# Altium PCB ALio Basic.PcbDoc (part 2 of 2)
Units mm, origin at the board's own origin, x right, y up, seen from the top; angles counter-clockwise.
Board outline 88.22 x 65.32 mm, 2 copper layers (Top Layer, Bottom Layer); 640 components, 0 nets, 4036 pads, 0 vias.
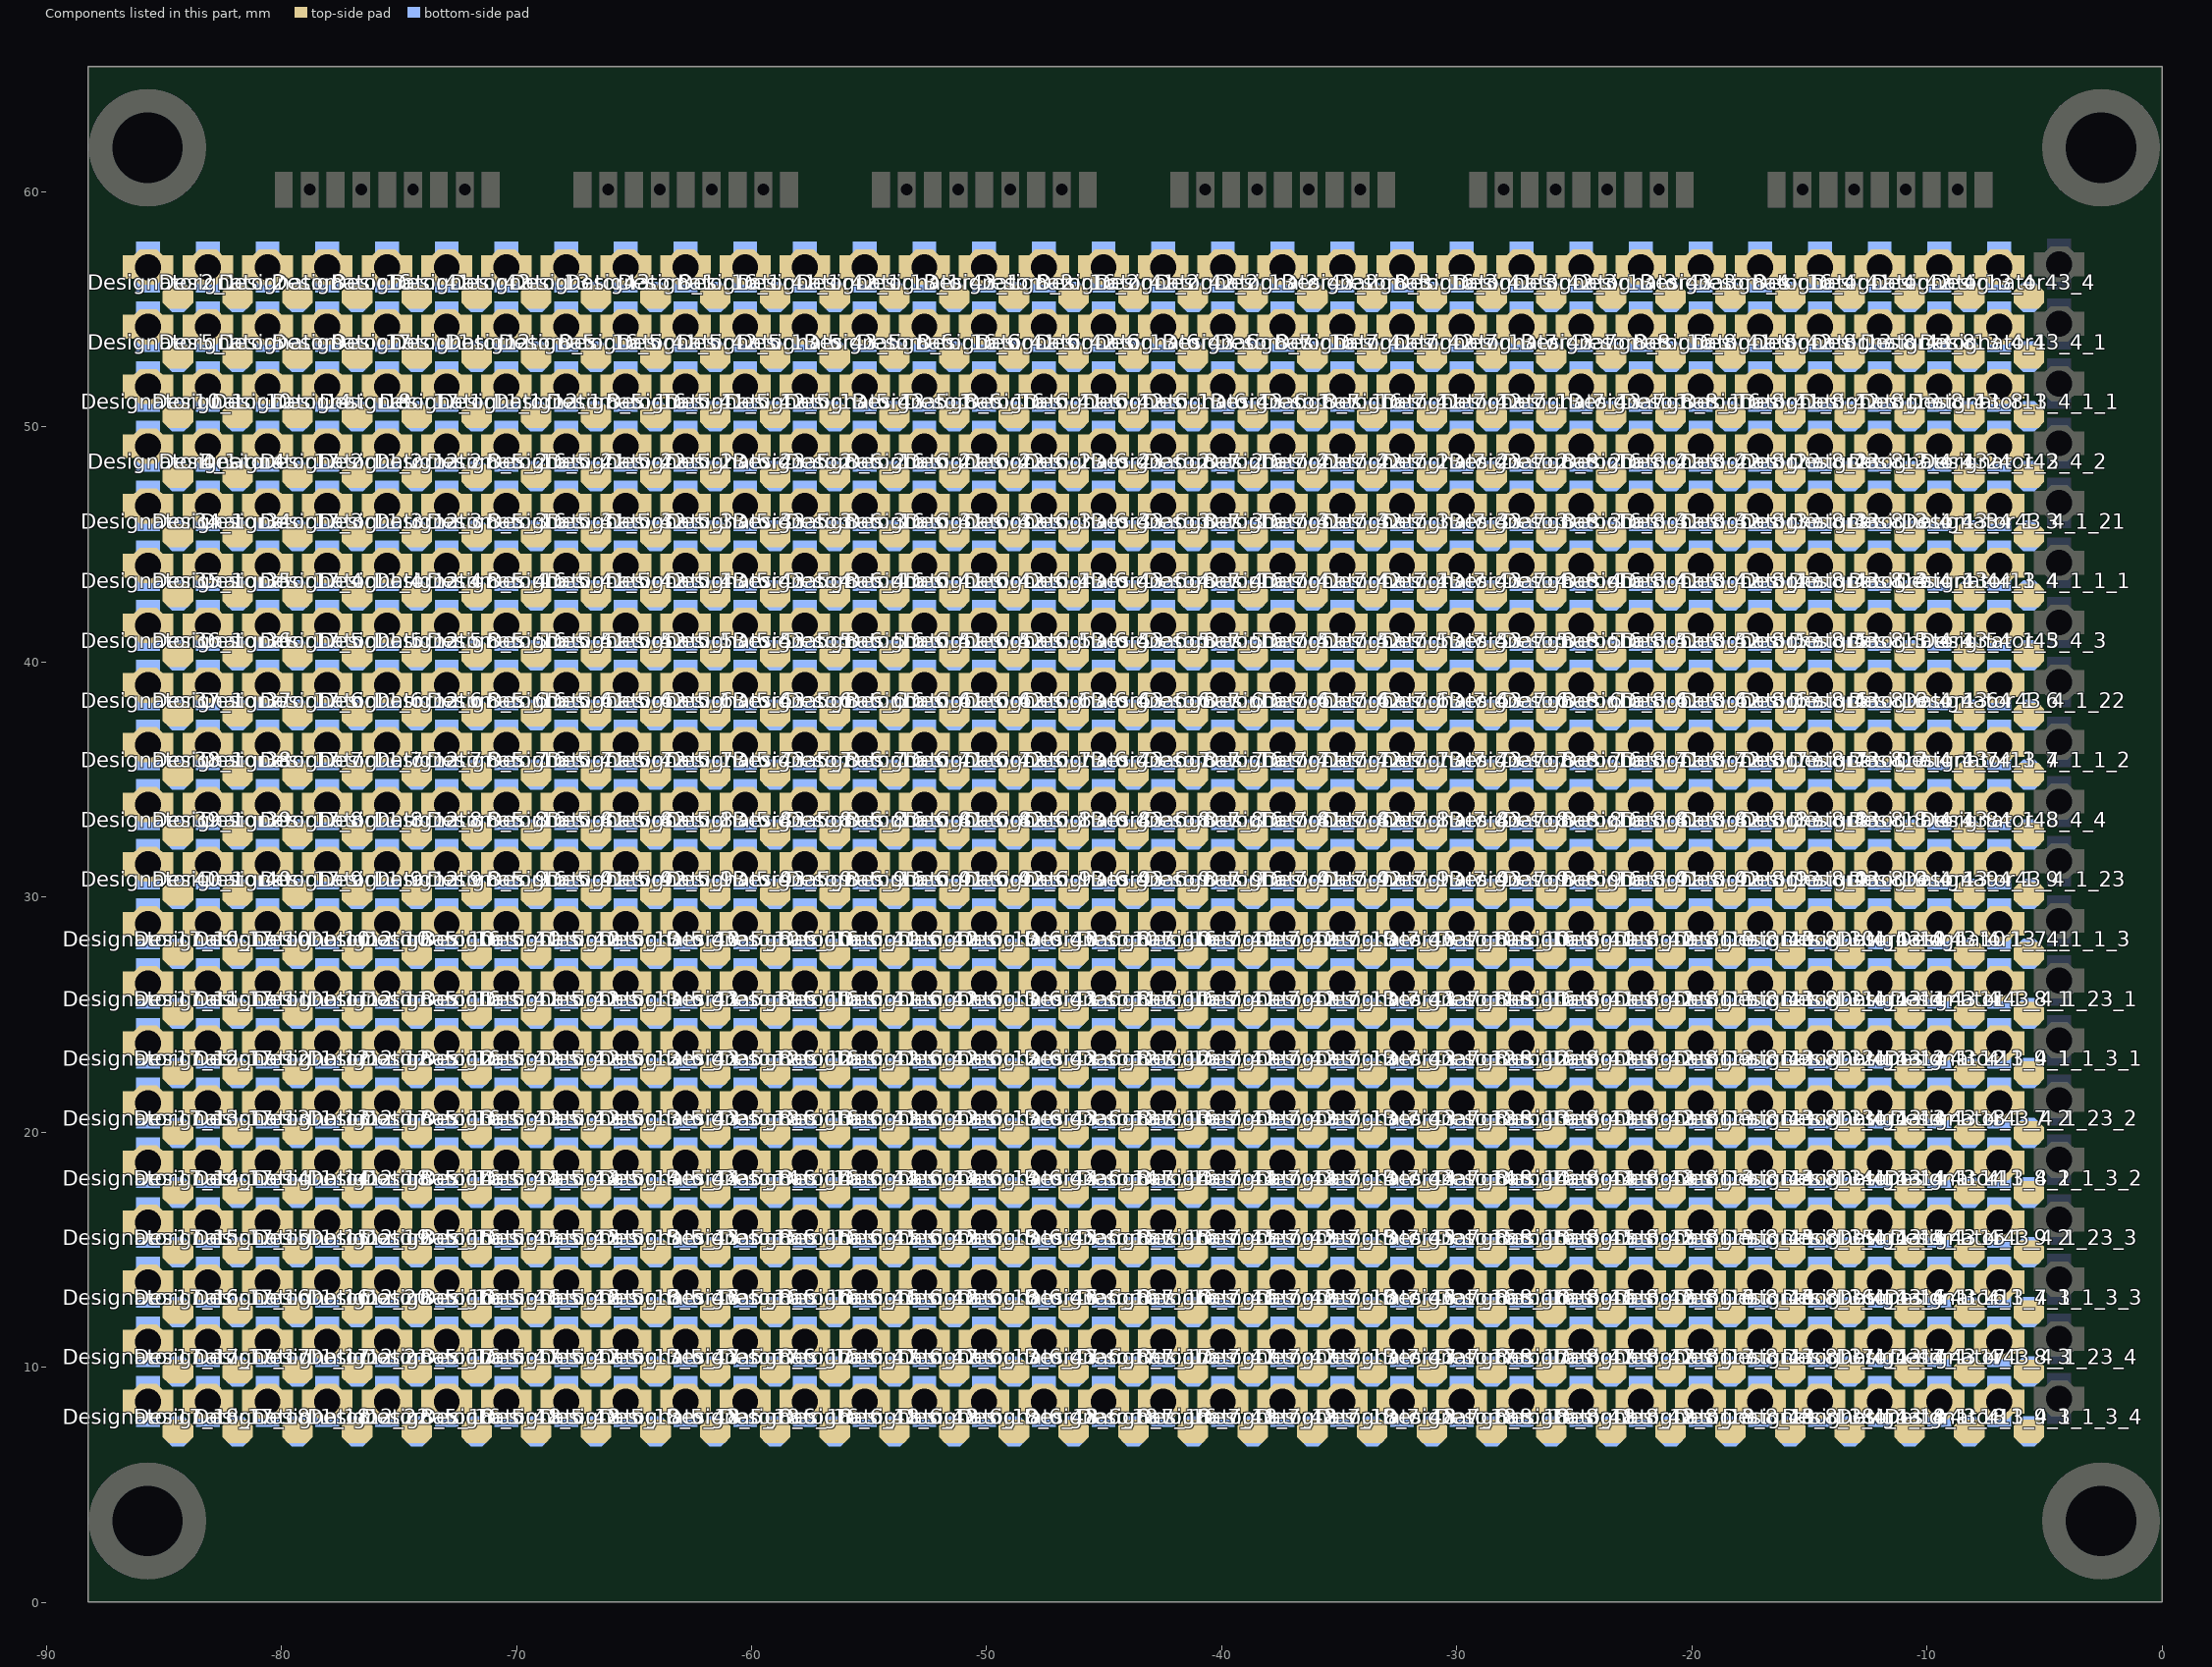
[diagram p2: the components of this part, seen from the top]

## Nets (pads, with @x,y where several pads share a name; then routed paths per layer and width w, separated by ;. In a path a pad name is that pad's centre, name@x,y a point inside that pad or via, vN(x,y) a via of type N, cw(c..) or ccw(c..) an arc to the next point about the centre after c; other vN are vias at no path point)
pads on no net: Designator2.1 Designator2.2 Designator2_1.1 Designator2_1.2 Designator4.1 Designator4.2 Designator4_1.1 Designator4_1.2 Designator5.1 Designator5.2 Designator5_1.1 Designator5_1.2 Designator8.1 Designator8.2 Designator8_1.1 Designator8_1.2 Designator8_2.1 Designator8_2.2 Designator8_3.1 Designator8_3.2 Designator8_4.1 Designator8_4.2 Designator8_5.1 Designator8_5.2 Designator8_5_1.1 Designator8_5_1.2 Designator8_5_2.1 Designator8_5_2.2 Designator8_5_3.1 Designator8_5_3.2 Designator8_5_4.1 Designator8_5_4.2 Designator8_5_5.1 Designator8_5_5.2 Designator8_5_6.1 Designator8_5_6.2 Designator8_5_7.1 Designator8_5_7.2 Designator8_5_8.1 Designator8_5_8.2 Designator8_5_9.1 Designator8_5_9.2 Designator8_5_10.1 Designator8_5_10.2 Designator8_5_11.1 Designator8_5_11.2 Designator8_5_12.1 Designator8_5_12.2 Designator8_5_13.1 Designator8_5_13.2 Designator8_5_14.1 Designator8_5_14.2 Designator8_5_15.1 Designator8_5_15.2 Designator8_5_16.1 Designator8_5_16.2 Designator8_5_17.1 Designator8_5_17.2 Designator8_5_18.1 Designator8_5_18.2 Designator8_6.1 Designator8_6.2 Designator8_6_1.1 Designator8_6_1.2 Designator8_6_2.1 Designator8_6_2.2 Designator8_6_3.1 Designator8_6_3.2 Designator8_6_4.1 Designator8_6_4.2 Designator8_6_5.1 Designator8_6_5.2 Designator8_6_6.1 Designator8_6_6.2 Designator8_6_7.1 Designator8_6_7.2 Designator8_6_8.1 Designator8_6_8.2 Designator8_6_9.1 Designator8_6_9.2 Designator8_6_10.1 Designator8_6_10.2 Designator8_6_11.1 Designator8_6_11.2 Designator8_6_12.1 Designator8_6_12.2 Designator8_6_13.1 Designator8_6_13.2 Designator8_6_14.1 Designator8_6_14.2 Designator8_6_15.1 Designator8_6_15.2 Designator8_6_16.1 Designator8_6_16.2 Designator8_6_17.1 Designator8_6_17.2 Designator8_6_18.1 Designator8_6_18.2 Designator8_7.1 Designator8_7.2 Designator8_7_1.1 Designator8_7_1.2 Designator8_7_2.1 Designator8_7_2.2 Designator8_7_3.1 Designator8_7_3.2 Designator8_7_4.1 Designator8_7_4.2 Designator8_7_5.1 Designator8_7_5.2 Designator8_7_6.1 Designator8_7_6.2 Designator8_7_7.1 Designator8_7_7.2 Designator8_7_8.1 Designator8_7_8.2 Designator8_7_9.1 Designator8_7_9.2 Designator8_7_10.1 Designator8_7_10.2 Designator8_7_11.1 Designator8_7_11.2 Designator8_7_12.1 Designator8_7_12.2 Designator8_7_13.1 Designator8_7_13.2 Designator8_7_14.1 Designator8_7_14.2 Designator8_7_15.1 Designator8_7_15.2 Designator8_7_16.1 Designator8_7_16.2 Designator8_7_17.1 Designator8_7_17.2 Designator8_7_18.1 Designator8_7_18.2 Designator8_8.1 Designator8_8.2 Designator8_8_1.1 Designator8_8_1.2 Designator8_8_2.1 Designator8_8_2.2 Designator8_8_3.1 Designator8_8_3.2 Designator8_8_4.1 Designator8_8_4.2 Designator8_8_5.1 Designator8_8_5.2 Designator8_8_6.1 Designator8_8_6.2 Designator8_8_7.1 Designator8_8_7.2 Designator8_8_8.1 Designator8_8_8.2 Designator8_8_9.1 Designator8_8_9.2 Designator8_8_10.1 Designator8_8_10.2 Designator8_8_11.1 Designator8_8_11.2 Designator8_8_12.1 Designator8_8_12.2 Designator8_8_13.1 Designator8_8_13.2 Designator8_8_14.1 Designator8_8_14.2 Designator8_8_15.1 Designator8_8_15.2 Designator8_8_16.1 Designator8_8_16.2 Designator8_8_17.1 Designator8_8_17.2 Designator8_8_18.1 Designator8_8_18.2 Designator9.1 Designator9.2 Designator10.1 Designator10.2 Designator10_1.1 Designator10_1.2 Designator11.1 Designator11.2 Designator11_1.1 Designator11_1.2 Designator11_2.1 Designator11_2.2 Designator11_3.1 Designator11_3.2 Designator11_4.1 Designator11_4.2 Designator11_5.1 Designator11_5.2 Designator11_6.1 Designator11_6.2 Designator11_7.1 Designator11_7.2 Designator11_8.1 Designator11_8.2 Designator11_9.1 Designator11_9.2 Designator11_10.1 Designator11_10.2 Designator11_11.1 Designator11_11.2 Designator11_12.1 Designator11_12.2 Designator11_13.1 Designator11_13.2 Designator11_14.1 Designator11_14.2 Designator11_15.1 Designator11_15.2 Designator11_16.1 Designator11_16.2 Designator11_17.1 Designator11_17.2 Designator11_18.1 Designator11_18.2 Designator12.1 Designator12.2 Designator12_1.1 Designator12_1.2 Designator12_2.1 Designator12_2.2 Designator12_3.1 Designator12_3.2 Designator12_4.1 Designator12_4.2 Designator12_5.1 Designator12_5.2 Designator12_6.1 Designator12_6.2 Designator12_7.1 Designator12_7.2 Designator12_8.1 Designator12_8.2 Designator12_9.1 Designator12_9.2 Designator12_10.1 Designator12_10.2 Designator12_11.1 Designator12_11.2 Designator12_12.1 Designator12_12.2 Designator12_17.1 Designator12_17.2 Designator12_18.1 Designator12_18.2 Designator12_19.1 Designator12_19.2 Designator12_20.1 Designator12_20.2 Designator12_21.1 Designator12_21.2 Designator12_22.1 Designator12_22.2 Designator13.1 Designator13.2 Designator13_1.1 Designator13_1.2 Designator13_2.1 Designator13_2.2 Designator13_3.1 Designator13_3.2 Designator13_4.1 Designator13_4.2 Designator13_4_1.1 Designator13_4_1.2 Designator13_4_1_1.1 Designator13_4_1_1.2 Designator13_4_1_1_1.1 Designator13_4_1_1_1.2 Designator13_4_1_1_2.1 Designator13_4_1_1_2.2 Designator13_4_1_1_3.1 Designator13_4_1_1_3.2 Designator13_4_1_1_3_1.1 Designator13_4_1_1_3_1.2 Designator13_4_1_1_3_2.1 Designator13_4_1_1_3_2.2 Designator13_4_1_1_3_3.1 Designator13_4_1_1_3_3.2 Designator13_4_1_1_3_4.1 Designator13_4_1_1_3_4.2 Designator13_4_1_2.1 Designator13_4_1_2.2 Designator13_4_1_3.1 Designator13_4_1_3.2 Designator13_4_1_4.1 Designator13_4_1_4.2 Designator13_4_1_5.1 Designator13_4_1_5.2 Designator13_4_1_6.1 Designator13_4_1_6.2 Designator13_4_1_7.1 Designator13_4_1_7.2 Designator13_4_1_8.1 Designator13_4_1_8.2 Designator13_4_1_9.1 Designator13_4_1_9.2 Designator13_4_1_10.1 Designator13_4_1_10.2 Designator13_4_1_11.1 Designator13_4_1_11.2 Designator13_4_1_12.1 Designator13_4_1_12.2 Designator13_4_1_13.1 Designator13_4_1_13.2 Designator13_4_1_14.1 Designator13_4_1_14.2 Designator13_4_1_15.1 Designator13_4_1_15.2 Designator13_4_1_16.1 Designator13_4_1_16.2 Designator13_4_1_17.1 Designator13_4_1_17.2 Designator13_4_1_18.1 Designator13_4_1_18.2 Designator13_5.1 Designator13_5.2 Designator13_5_1.1 Designator13_5_1.2 Designator13_5_2.1 Designator13_5_2.2 Designator13_5_3.1 Designator13_5_3.2 Designator13_5_4.1 Designator13_5_4.2 Designator13_5_5.1 Designator13_5_5.2 Designator13_5_6.1 Designator13_5_6.2 Designator13_5_7.1 Designator13_5_7.2 Designator13_5_8.1 Designator13_5_8.2 Designator13_5_9.1 Designator13_5_9.2 Designator13_5_10.1 Designator13_5_10.2 Designator13_5_11.1 Designator13_5_11.2 Designator13_5_12.1 Designator13_5_12.2 Designator13_5_13.1 Designator13_5_13.2 Designator13_5_14.1 Designator13_5_14.2 Designator13_5_15.1 Designator13_5_15.2 Designator13_5_16.1 Designator13_5_16.2 Designator13_5_17.1 Designator13_5_17.2 Designator13_5_18.1 Designator13_5_18.2 Designator13_6.1 Designator13_6.2 Designator13_6_1.1 Designator13_6_1.2 Designator13_6_2.1 Designator13_6_2.2 Designator13_6_3.1 Designator13_6_3.2 Designator13_6_4.1 Designator13_6_4.2 Designator13_6_5.1 Designator13_6_5.2 Designator13_6_6.1 Designator13_6_6.2 Designator13_6_7.1 Designator13_6_7.2 Designator13_6_8.1 Designator13_6_8.2 Designator13_6_9.1 Designator13_6_9.2 Designator13_6_10.1 Designator13_6_10.2 Designator13_6_11.1 Designator13_6_11.2 Designator13_6_12.1 Designator13_6_12.2 Designator13_6_13.1 Designator13_6_13.2 Designator13_6_14.1 Designator13_6_14.2 Designator13_6_15.1 Designator13_6_15.2 Designator13_6_16.1 Designator13_6_16.2 Designator13_6_17.1 Designator13_6_17.2 Designator13_6_18.1 Designator13_6_18.2 Designator13_7.1 Designator13_7.2 Designator13_7_1.1 Designator13_7_1.2 Designator13_7_2.1 Designator13_7_2.2 Designator13_7_3.1 Designator13_7_3.2 Designator13_7_4.1 Designator13_7_4.2 Designator13_7_5.1 Designator13_7_5.2 Designator13_7_6.1 Designator13_7_6.2 Designator13_7_7.1 Designator13_7_7.2 Designator13_7_8.1 Designator13_7_8.2 Designator13_7_9.1 Designator13_7_9.2 Designator13_7_10.1 Designator13_7_10.2 Designator13_7_11.1 Designator13_7_11.2 Designator13_7_12.1 Designator13_7_12.2 Designator13_7_13.1 Designator13_7_13.2 Designator13_7_14.1 Designator13_7_14.2 Designator13_7_15.1 Designator13_7_15.2 Designator13_7_16.1 Designator13_7_16.2 Designator13_7_17.1 Designator13_7_17.2 Designator13_7_18.1 Designator13_7_18.2 Designator13_8.1 Designator13_8.2 Designator13_8_1.1 Designator13_8_1.2 Designator13_8_2.1 Designator13_8_2.2 Designator13_8_3.1 Designator13_8_3.2 Designator13_8_4.1 Designator13_8_4.2 Designator13_8_5.1 Designator13_8_5.2 Designator13_8_6.1 Designator13_8_6.2 Designator13_8_7.1 Designator13_8_7.2 Designator13_8_8.1 Designator13_8_8.2 Designator13_8_9.1 Designator13_8_9.2 Designator13_8_10.1 Designator13_8_10.2 Designator13_8_11.1 Designator13_8_11.2 Designator13_8_12.1 Designator13_8_12.2 Designator13_8_13.1 Designator13_8_13.2 Designator13_8_14.1 Designator13_8_14.2 Designator13_8_15.1 Designator13_8_15.2 Designator13_8_16.1 Designator13_8_16.2 Designator13_8_17.1 Designator13_8_17.2 Designator13_8_18.1 Designator13_8_18.2 Designator14.1 Designator14.2 Designator16.1 Designator16.2 Designator16_1.1 Designator16_1.2 Designator16_2.1 Designator16_2.2 Designator16_3.1 Designator16_3.2 Designator16_4.1 Designator16_4.2 Designator16_5.1 Designator16_5.2 Designator16_5_1.1 Designator16_5_1.2 Designator16_5_2.1 Designator16_5_2.2 Designator16_5_3.1 Designator16_5_3.2 Designator16_5_4.1 Designator16_5_4.2 Designator16_5_5.1 Designator16_5_5.2 Designator16_5_6.1 Designator16_5_6.2 Designator16_5_7.1 Designator16_5_7.2 Designator16_5_8.1 Designator16_5_8.2 Designator16_5_9.1 Designator16_5_9.2 Designator16_5_10.1 Designator16_5_10.2 Designator16_5_11.1 Designator16_5_11.2 Designator16_5_12.1 Designator16_5_12.2 Designator16_5_13.1 Designator16_5_13.2 Designator16_5_14.1 Designator16_5_14.2 Designator16_5_15.1 Designator16_5_15.2 Designator16_5_16.1 Designator16_5_16.2 Designator16_5_17.1 Designator16_5_17.2 Designator16_5_18.1 Designator16_5_18.2 Designator16_6.1 Designator16_6.2 Designator16_6_1.1 Designator16_6_1.2 Designator16_6_2.1 Designator16_6_2.2 Designator16_6_3.1 Designator16_6_3.2 Designator16_6_4.1 Designator16_6_4.2 Designator16_6_5.1 Designator16_6_5.2 Designator16_6_6.1 Designator16_6_6.2 Designator16_6_7.1 Designator16_6_7.2 Designator16_6_8.1 Designator16_6_8.2 Designator16_6_9.1 Designator16_6_9.2 Designator16_6_10.1 Designator16_6_10.2 Designator16_6_11.1 Designator16_6_11.2 Designator16_6_12.1 Designator16_6_12.2 Designator16_6_13.1 Designator16_6_13.2 Designator16_6_14.1 Designator16_6_14.2 Designator16_6_15.1 Designator16_6_15.2 Designator16_6_16.1 Designator16_6_16.2 Designator16_6_17.1 Designator16_6_17.2 Designator16_6_18.1 Designator16_6_18.2 Designator16_7.1 Designator16_7.2 Designator16_7_1.1 Designator16_7_1.2 Designator16_7_2.1 Designator16_7_2.2 Designator16_7_3.1 Designator16_7_3.2 Designator16_7_4.1 Designator16_7_4.2 Designator16_7_5.1 Designator16_7_5.2 Designator16_7_6.1 Designator16_7_6.2 Designator16_7_7.1 Designator16_7_7.2 Designator16_7_8.1 Designator16_7_8.2 Designator16_7_9.1 Designator16_7_9.2 Designator16_7_10.1 Designator16_7_10.2 Designator16_7_11.1 Designator16_7_11.2 Designator16_7_12.1 Designator16_7_12.2 Designator16_7_13.1 Designator16_7_13.2 Designator16_7_14.1 Designator16_7_14.2 Designator16_7_15.1 Designator16_7_15.2 Designator16_7_16.1 Designator16_7_16.2 Designator16_7_17.1 Designator16_7_17.2 Designator16_7_18.1 Designator16_7_18.2 Designator16_8.1 Designator16_8.2 Designator16_8_1.1 Designator16_8_1.2 Designator16_8_2.1 Designator16_8_2.2 Designator16_8_3.1 Designator16_8_3.2 Designator16_8_4.1 Designator16_8_4.2 Designator16_8_5.1 Designator16_8_5.2 Designator16_8_6.1 Designator16_8_6.2 Designator16_8_7.1 Designator16_8_7.2 Designator16_8_8.1 Designator16_8_8.2 Designator16_8_9.1 Designator16_8_9.2 Designator16_8_10.1 Designator16_8_10.2 Designator16_8_11.1 Designator16_8_11.2 Designator16_8_12.1 Designator16_8_12.2 Designator16_8_13.1 Designator16_8_13.2 Designator16_8_14.1 Designator16_8_14.2 Designator16_8_15.1 Designator16_8_15.2 Designator16_8_16.1 Designator16_8_16.2 Designator16_8_17.1 Designator16_8_17.2 Designator16_8_18.1 Designator16_8_18.2 Designator17.1 Designator17.2 Designator17_1.1 Designator17_1.2 Designator17_2.1 Designator17_2.2 Designator17_3.1 Designator17_3.2 Designator17_4.1 Designator17_4.2 Designator17_5.1 Designator17_5.2 Designator17_6.1 Designator17_6.2 Designator17_7.1 Designator17_7.2 Designator17_8.1 Designator17_8.2 Designator17_9.1 Designator17_9.2 Designator17_10.1 Designator17_10.2 Designator17_10_1.1 Designator17_10_1.2 Designator17_11.1 Designator17_11.2 Designator17_11_1.1 Designator17_11_1.2 Designator17_12.1 Designator17_12.2 Designator17_12_1.1 Designator17_12_1.2 Designator17_13.1 Designator17_13.2 Designator17_13_1.1 Designator17_13_1.2 Designator17_14.1 Designator17_14.2 Designator17_14_1.1 Designator17_14_1.2 Designator17_15.1 Designator17_15.2 Designator17_15_1.1 Designator17_15_1.2 Designator17_16.1 Designator17_16.2 Designator17_16_1.1 Designator17_16_1.2 Designator17_17.1 Designator17_17.2 Designator17_17_1.1 Designator17_17_1.2 Designator17_18.1 Designator17_18.2 Designator17_18_1.1 Designator17_18_1.2 Designator18.1 Designator18.2 Designator34.1 Designator34.2 Designator34_1.1 Designator34_1.2 Designator35.1 Designator35.2 Designator35_1.1 Designator35_1.2 Designator36.1 Designator36.2 Designator36_1.1 Designator36_1.2 Designator37.1 Designator37.2 Designator37_1.1 Designator37_1.2 Designator38.1 Designator38.2 Designator38_1.1 Designator38_1.2 Designator39.1 Designator39.2 Designator39_1.1 Designator39_1.2 Designator40.1 Designator40.2 Designator40_1.1 Designator40_1.2 Designator41.1 Designator41.2 Designator41_1.1 Designator41_1.2 Designator41_2.1 Designator41_2.2 Designator41_3.1 Designator41_3.2 Designator41_4.1 Designator41_4.2 Designator41_5.1 Designator41_5.2 Designator41_5_1.1 Designator41_5_1.2 Designator41_5_2.1 Designator41_5_2.2 Designator41_5_3.1 Designator41_5_3.2 Designator41_5_4.1 Designator41_5_4.2 Designator41_5_5.1 Designator41_5_5.2 Designator41_5_6.1 Designator41_5_6.2 Designator41_5_7.1 Designator41_5_7.2 Designator41_5_8.1 Designator41_5_8.2 Designator41_5_9.1 Designator41_5_9.2 Designator41_5_10.1 Designator41_5_10.2 Designator41_5_11.1 Designator41_5_11.2 Designator41_5_12.1 Designator41_5_12.2 Designator41_5_13.1 Designator41_5_13.2 Designator41_5_14.1 Designator41_5_14.2 Designator41_5_15.1 Designator41_5_15.2 Designator41_5_16.1 Designator41_5_16.2 Designator41_5_17.1 Designator41_5_17.2 Designator41_5_18.1 Designator41_5_18.2 Designator41_6.1 Designator41_6.2 Designator41_6_1.1 Designator41_6_1.2 Designator41_6_2.1 Designator41_6_2.2 Designator41_6_3.1 Designator41_6_3.2 Designator41_6_4.1 Designator41_6_4.2 Designator41_6_5.1 Designator41_6_5.2 Designator41_6_6.1 Designator41_6_6.2 Designator41_6_7.1 Designator41_6_7.2 Designator41_6_8.1 Designator41_6_8.2 Designator41_6_9.1 Designator41_6_9.2 Designator41_6_10.1 Designator41_6_10.2 Designator41_6_11.1 Designator41_6_11.2 Designator41_6_12.1 Designator41_6_12.2 Designator41_6_13.1 Designator41_6_13.2 Designator41_6_14.1 Designator41_6_14.2 Designator41_6_15.1 Designator41_6_15.2 Designator41_6_16.1 Designator41_6_16.2 Designator41_6_17.1 Designator41_6_17.2 Designator41_6_18.1 Designator41_6_18.2 Designator41_7.1 Designator41_7.2 Designator41_7_1.1 Designator41_7_1.2 Designator41_7_2.1 Designator41_7_2.2 Designator41_7_3.1 Designator41_7_3.2 Designator41_7_4.1 Designator41_7_4.2 Designator41_7_5.1 Designator41_7_5.2 Designator41_7_6.1 Designator41_7_6.2 Designator41_7_7.1 Designator41_7_7.2 Designator41_7_8.1 Designator41_7_8.2 Designator41_7_9.1 Designator41_7_9.2 Designator41_7_10.1 Designator41_7_10.2 Designator41_7_11.1 Designator41_7_11.2 Designator41_7_12.1 Designator41_7_12.2 Designator41_7_13.1 Designator41_7_13.2 Designator41_7_14.1 Designator41_7_14.2 Designator41_7_15.1 Designator41_7_15.2 Designator41_7_16.1 Designator41_7_16.2 Designator41_7_17.1 Designator41_7_17.2 Designator41_7_18.1 Designator41_7_18.2 Designator41_8.1 Designator41_8.2 Designator41_8_1.1 Designator41_8_1.2 Designator41_8_2.1 Designator41_8_2.2 Designator41_8_3.1 Designator41_8_3.2 Designator41_8_4.1 Designator41_8_4.2 Designator41_8_5.1 Designator41_8_5.2 Designator41_8_6.1 Designator41_8_6.2 Designator41_8_7.1 Designator41_8_7.2 Designator41_8_8.1 Designator41_8_8.2 Designator41_8_9.1 Designator41_8_9.2 Designator41_8_10.1 Designator41_8_10.2 Designator41_8_11.1 Designator41_8_11.2 Designator41_8_12.1 Designator41_8_12.2 Designator41_8_13.1 Designator41_8_13.2 Designator41_8_14.1 Designator41_8_14.2 Designator41_8_15.1 Designator41_8_15.2 Designator41_8_16.1 Designator41_8_16.2 Designator41_8_17.1 Designator41_8_17.2 Designator41_8_18.1 Designator41_8_18.2 Designator42.1 Designator42.2 Designator42_1.1 Designator42_1.2 Designator42_2.1 Designator42_2.2 Designator42_3.1 Designator42_3.2 Designator42_4.1 Designator42_4.2 Designator42_5.1 Designator42_5.2 Designator42_5_1.1 Designator42_5_1.2 Designator42_5_2.1 Designator42_5_2.2 Designator42_5_3.1 Designator42_5_3.2 Designator42_5_4.1 Designator42_5_4.2 Designator42_5_5.1 Designator42_5_5.2 Designator42_5_6.1 Designator42_5_6.2 Designator42_5_7.1 Designator42_5_7.2 Designator42_5_8.1 Designator42_5_8.2 Designator42_5_9.1 Designator42_5_9.2 Designator42_5_10.1 Designator42_5_10.2 Designator42_5_11.1 Designator42_5_11.2 Designator42_5_12.1 Designator42_5_12.2 Designator42_5_13.1 Designator42_5_13.2 Designator42_5_14.1 Designator42_5_14.2 Designator42_5_15.1 Designator42_5_15.2 Designator42_5_16.1 Designator42_5_16.2 Designator42_5_17.1 Designator42_5_17.2 Designator42_5_18.1 Designator42_5_18.2 Designator42_6.1 Designator42_6.2 Designator42_6_1.1 Designator42_6_1.2 Designator42_6_2.1 Designator42_6_2.2 Designator42_6_3.1 Designator42_6_3.2 Designator42_6_4.1 Designator42_6_4.2 Designator42_6_5.1 Designator42_6_5.2 Designator42_6_6.1 Designator42_6_6.2 Designator42_6_7.1 Designator42_6_7.2 Designator42_6_8.1 Designator42_6_8.2 Designator42_6_9.1 Designator42_6_9.2 Designator42_6_10.1 Designator42_6_10.2 Designator42_6_11.1 Designator42_6_11.2 Designator42_6_12.1 Designator42_6_12.2 Designator42_6_13.1 Designator42_6_13.2 Designator42_6_14.1 Designator42_6_14.2 Designator42_6_15.1 Designator42_6_15.2 Designator42_6_16.1 Designator42_6_16.2 Designator42_6_17.1 Designator42_6_17.2 Designator42_6_18.1 Designator42_6_18.2 Designator42_7.1 Designator42_7.2 Designator42_7_1.1 Designator42_7_1.2 Designator42_7_2.1 Designator42_7_2.2 Designator42_7_3.1 Designator42_7_3.2 Designator42_7_4.1 Designator42_7_4.2 Designator42_7_5.1 Designator42_7_5.2 Designator42_7_6.1 Designator42_7_6.2 Designator42_7_7.1 Designator42_7_7.2 Designator42_7_8.1 Designator42_7_8.2 Designator42_7_9.1 Designator42_7_9.2 Designator42_7_10.1 Designator42_7_10.2 Designator42_7_11.1 Designator42_7_11.2 Designator42_7_12.1 Designator42_7_12.2 Designator42_7_13.1 Designator42_7_13.2 Designator42_7_14.1 Designator42_7_14.2 Designator42_7_15.1 Designator42_7_15.2 Designator42_7_16.1 Designator42_7_16.2 Designator42_7_17.1 Designator42_7_17.2 Designator42_7_18.1 Designator42_7_18.2 Designator42_8.1 Designator42_8.2 Designator42_8_1.1 Designator42_8_1.2 Designator42_8_2.1 Designator42_8_2.2 Designator42_8_3.1 Designator42_8_3.2 Designator42_8_4.1 Designator42_8_4.2 Designator42_8_5.1 Designator42_8_5.2 Designator42_8_6.1 Designator42_8_6.2 Designator42_8_7.1 Designator42_8_7.2 Designator42_8_8.1 Designator42_8_8.2 Designator42_8_9.1 Designator42_8_9.2 Designator42_8_10.1 Designator42_8_10.2 Designator42_8_11.1 Designator42_8_11.2 Designator42_8_12.1 Designator42_8_12.2 Designator42_8_13.1 Designator42_8_13.2 Designator42_8_14.1 Designator42_8_14.2 Designator42_8_15.1 Designator42_8_15.2 Designator42_8_16.1 Designator42_8_16.2 Designator42_8_17.1 Designator42_8_17.2 Designator42_8_18.1 Designator42_8_18.2 Designator43.1 Designator43.2 Designator43_1.1 Designator43_1.2 Designator43_2.1 Designator43_2.2 Designator43_3.1 Designator43_3.2 Designator43_4.1 Designator43_4.2 Designator43_4_1.1 Designator43_4_1.2 Designator43_4_1_2.1 Designator43_4_1_2.2 Designator43_4_1_3.1 Designator43_4_1_3.2 Designator43_4_1_4.1 Designator43_4_1_4.2 Designator43_4_1_5.1 Designator43_4_1_5.2 Designator43_4_1_6.1 Designator43_4_1_6.2 Designator43_4_1_7.1 Designator43_4_1_7.2 Designator43_4_1_7_1.1 Designator43_4_1_7_1.2 Designator43_4_1_7_2.1 Designator43_4_1_7_2.2 Designator43_4_1_7_3.1 Designator43_4_1_7_3.2 Designator43_4_1_8.1 Designator43_4_1_8.2 Designator43_4_1_8_1.1 Designator43_4_1_8_1.2 Designator43_4_1_8_2.1 Designator43_4_1_8_2.2 Designator43_4_1_8_3.1 Designator43_4_1_8_3.2 Designator43_4_1_9.1 Designator43_4_1_9.2 Designator43_4_1_9_1.1 Designator43_4_1_9_1.2 Designator43_4_1_9_2.1 Designator43_4_1_9_2.2 Designator43_4_1_9_3.1 Designator43_4_1_9_3.2 Designator43_4_1_10.1 Designator43_4_1_10.2 Designator43_4_1_11.1 Designator43_4_1_11.2 Designator43_4_1_12.1 Designator43_4_1_12.2 Designator43_4_1_13.1 Designator43_4_1_13.2 Designator43_4_1_14.1 Designator43_4_1_14.2 Designator43_4_1_15.1 Designator43_4_1_15.2 Designator43_4_1_16.1 Designator43_4_1_16.2 Designator43_4_1_17.1 Designator43_4_1_17.2 Designator43_4_1_18.1 Designator43_4_1_18.2 Designator43_4_1_21.1 Designator43_4_1_21.2 Designator43_4_1_22.1 Designator43_4_1_22.2 Designator43_4_1_23.1 Designator43_4_1_23.2 Designator43_4_1_23_1.1 Designator43_4_1_23_1.2 Designator43_4_1_23_2.1 Designator43_4_1_23_2.2 Designator43_4_1_23_3.1 Designator43_4_1_23_3.2 Designator43_4_1_23_4.1 Designator43_4_1_23_4.2 Designator43_4_2.1 Designator43_4_2.2 Designator43_4_3.1 Designator43_4_3.2 Designator43_4_4.1 Designator43_4_4.2 Designator43_5.1 Designator43_5.2 Designator43_5_1.1 Designator43_5_1.2 Designator43_5_2.1 Designator43_5_2.2 Designator43_5_3.1 Designator43_5_3.2 Designator43_5_4.1 Designator43_5_4.2 Designator43_5_5.1 Designator43_5_5.2 Designator43_5_6.1 Designator43_5_6.2 Designator43_5_7.1 Designator43_5_7.2 Designator43_5_8.1 Designator43_5_8.2 Designator43_5_9.1 Designator43_5_9.2 Designator43_5_10.1 Designator43_5_10.2 Designator43_5_11.1 Designator43_5_11.2 Designator43_5_12.1 Designator43_5_12.2 Designator43_5_13.1 Designator43_5_13.2 Designator43_5_14.1 Designator43_5_14.2 Designator43_5_15.1 Designator43_5_15.2 Designator43_5_16.1 Designator43_5_16.2 Designator43_5_17.1 Designator43_5_17.2 Designator43_5_18.1 Designator43_5_18.2 Designator43_6.1 Designator43_6.2 Designator43_6_1.1 Designator43_6_1.2 Designator43_6_2.1 Designator43_6_2.2 Designator43_6_3.1 Designator43_6_3.2 Designator43_6_4.1 Designator43_6_4.2 Designator43_6_5.1 Designator43_6_5.2 Designator43_6_6.1 Designator43_6_6.2 Designator43_6_7.1 Designator43_6_7.2 Designator43_6_8.1 Designator43_6_8.2 Designator43_6_9.1 Designator43_6_9.2 Designator43_6_10.1 Designator43_6_10.2 Designator43_6_11.1 Designator43_6_11.2 Designator43_6_12.1 Designator43_6_12.2 Designator43_6_13.1 Designator43_6_13.2 Designator43_6_14.1 Designator43_6_14.2 Designator43_6_15.1 Designator43_6_15.2 Designator43_6_16.1 Designator43_6_16.2 Designator43_6_17.1 Designator43_6_17.2 Designator43_6_18.1 Designator43_6_18.2 Designator43_7.1 Designator43_7.2 Designator43_7_1.1 Designator43_7_1.2 Designator43_7_2.1 Designator43_7_2.2 Designator43_7_3.1 Designator43_7_3.2 Designator43_7_4.1 Designator43_7_4.2 Designator43_7_5.1 Designator43_7_5.2 Designator43_7_6.1 Designator43_7_6.2 Designator43_7_7.1 Designator43_7_7.2 Designator43_7_8.1 Designator43_7_8.2 Designator43_7_9.1 Designator43_7_9.2 Designator43_7_10.1 Designator43_7_10.2 Designator43_7_11.1 Designator43_7_11.2 Designator43_7_12.1 Designator43_7_12.2 Designator43_7_13.1 Designator43_7_13.2 Designator43_7_14.1 Designator43_7_14.2 Designator43_7_15.1 Designator43_7_15.2 Designator43_7_16.1 Designator43_7_16.2 Designator43_7_17.1 Designator43_7_17.2 Designator43_7_18.1 Designator43_7_18.2 Designator43_8.1 Designator43_8.2 Designator43_8_1.1 Designator43_8_1.2 Designator43_8_2.1 Designator43_8_2.2 Designator43_8_3.1 Designator43_8_3.2 Designator43_8_4.1 Designator43_8_4.2 Designator43_8_5.1 Designator43_8_5.2 Designator43_8_6.1 Designator43_8_6.2 Designator43_8_7.1 Designator43_8_7.2 Designator43_8_8.1 Designator43_8_8.2 Designator43_8_9.1 Designator43_8_9.2 Designator43_8_10.1 Designator43_8_10.2 Designator43_8_11.1 Designator43_8_11.2 Designator43_8_12.1 Designator43_8_12.2 Designator43_8_13.1 Designator43_8_13.2 Designator43_8_14.1 Designator43_8_14.2 Designator43_8_15.1 Designator43_8_15.2 Designator43_8_16.1 Designator43_8_16.2 Designator43_8_17.1 Designator43_8_17.2 Designator43_8_18.1 Designator43_8_18.2
copper on no net: | length 321.4
  Top Layer w0.254: -80.592,56.8 -80.592,59.431 -79.924,60.1 ; -78.052,56.8 -77.724,57.129 -77.724,60.1 ; -75.512,56.8 -75.512,60.089 ; -75.506,60.1 -75.495,60.089 ; -73.324,57.151 -72.972,56.8 ; -73.301,57.129 -73.301,60.1 ; -71.101,60.1 -70.432,59.431 -70.432,56.8 ; -67.892,56.8 -67.892,59.431 -67.224,60.1 ; -65.352,56.8 -65.024,57.129 -65.024,60.1 ; -62.812,56.8 -62.812,60.089 ; -62.806,60.1 -62.795,60.089 ; -60.624,57.151 -60.272,56.8 ; -60.601,57.129 -60.601,60.1 ; -58.401,60.1 -57.732,59.431 -57.732,56.8 ; -55.192,56.8 -55.192,59.431 -54.524,60.1 ; -52.652,56.8 -52.324,57.129 -52.324,60.1 ; -50.112,56.8 -50.112,60.089 ; -50.106,60.1 -50.095,60.089 ; -47.924,57.151 -47.572,56.8 ; -47.901,57.129 -47.901,60.1 ; -45.701,60.1 -45.032,59.431 -45.032,56.8 ; -42.492,56.8 -42.492,59.431 -41.824,60.1 ; -39.952,56.8 -39.624,57.129 -39.624,60.1 ; -37.412,56.8 -37.412,60.089 ; -37.406,60.1 -37.395,60.089 ; -35.224,57.151 -34.872,56.8 ; -35.201,57.129 -35.201,60.1 ; -33.001,60.1 -32.332,59.431 -32.332,56.8 ; -29.792,56.8 -29.792,59.431 -29.124,60.1 ; -27.252,56.8 -26.924,57.129 -26.924,60.1 ; -24.712,56.8 -24.712,60.089 ; -24.706,60.1 -24.695,60.089 ; -22.524,57.151 -22.172,56.8 ; -22.501,57.129 -22.501,60.1 ; -20.301,60.1 -19.632,59.431 -19.632,56.8 ; -17.092,56.8 -17.092,59.431 -16.424,60.1 ; -14.552,56.8 -14.224,57.129 -14.224,60.1 ; -12.012,56.8 -12.012,60.089 ; -12.006,60.1 -11.995,60.089 ; -9.824,57.151 -9.472,56.8 ; -9.801,57.129 -9.801,60.1 ; -7.601,60.1 -6.932,59.431 -6.932,56.8
  Bottom Layer w0.254: -80.592,56.8 -80.592,59.431 -79.924,60.1 ; -79.322,55.53 -79.322,58.07 -78.801,58.591 -78.801,60.1 ; -78.052,56.8 -77.701,57.151 ; -77.724,57.129 -77.724,60.1 ; -76.782,55.53 -76.782,58.07 -76.601,58.251 -76.601,60.1 ; -75.512,56.8 -75.512,60.089 ; -75.506,60.089 -75.495,60.1 ; -74.401,60.1 -74.401,58.229 -74.242,58.07 -74.242,55.53 ; -73.301,60.1 -73.301,57.129 -72.972,56.8 ; -72.201,60.1 -72.201,58.569 -71.702,58.07 -71.702,55.53 ; -71.101,60.1 -70.432,59.431 -70.432,56.8 ; -67.892,56.8 -67.892,59.431 -67.224,60.1 ; -66.622,55.53 -66.622,58.07 -66.101,58.591 -66.101,60.1 ; -65.352,56.8 -65.001,57.151 ; -65.024,57.129 -65.024,60.1 ; -64.082,55.53 -64.082,58.07 -63.901,58.251 -63.901,60.1 ; -62.812,56.8 -62.812,60.089 ; -62.806,60.089 -62.795,60.1 ; -61.701,60.1 -61.701,58.229 -61.542,58.07 -61.542,55.53 ; -60.601,60.1 -60.601,57.129 -60.272,56.8 ; -59.501,60.1 -59.501,58.569 -59.002,58.07 -59.002,55.53 ; -58.401,60.1 -57.732,59.431 -57.732,56.8 ; -55.192,56.8 -55.192,59.431 -54.524,60.1 ; -53.922,55.53 -53.922,58.07 -53.401,58.591 -53.401,60.1 ; -52.652,56.8 -52.301,57.151 ; -52.324,57.129 -52.324,60.1 ; -51.382,55.53 -51.382,58.07 -51.201,58.251 -51.201,60.1 ; -50.112,56.8 -50.112,60.089 ; -50.106,60.089 -50.095,60.1 ; -49.001,60.1 -49.001,58.229 -48.842,58.07 -48.842,55.53 ; -47.901,60.1 -47.901,57.129 -47.572,56.8 ; -46.801,60.1 -46.801,58.569 -46.302,58.07 -46.302,55.53 ; -45.701,60.1 -45.032,59.431 -45.032,56.8 ; -42.492,56.8 -42.492,59.431 -41.824,60.1 ; -41.222,55.53 -41.222,58.07 -40.701,58.591 -40.701,60.1 ; -39.952,56.8 -39.601,57.151 ; -39.624,57.129 -39.624,60.1 ; -38.682,55.53 -38.682,58.07 -38.501,58.251 -38.501,60.1 ; -37.412,56.8 -37.412,60.089 ; -37.406,60.089 -37.395,60.1 ; -36.301,60.1 -36.301,58.229 -36.142,58.07 -36.142,55.53 ; -35.201,60.1 -35.201,57.129 -34.872,56.8 ; -34.101,60.1 -34.101,58.569 -33.602,58.07 -33.602,55.53 ; -33.001,60.1 -32.332,59.431 -32.332,56.8 ; -29.792,56.8 -29.792,59.431 -29.124,60.1 ; -28.522,55.53 -28.522,58.07 -28.001,58.591 -28.001,60.1 ; -27.252,56.8 -26.901,57.151 ; -26.924,57.129 -26.924,60.1 ; -25.982,55.53 -25.982,58.07 -25.801,58.251 -25.801,60.1 ; -24.712,56.8 -24.712,60.089 ; -24.706,60.089 -24.695,60.1 ; -23.601,60.1 -23.601,58.229 -23.442,58.07 -23.442,55.53 ; -22.501,60.1 -22.501,57.129 -22.172,56.8 ; -21.401,60.1 -21.401,58.569 -20.902,58.07 -20.902,55.53 ; -20.301,60.1 -19.632,59.431 -19.632,56.8 ; -17.092,56.8 -17.092,59.431 -16.424,60.1 ; -15.822,55.53 -15.822,58.07 -15.301,58.591 -15.301,60.1 ; -14.552,56.8 -14.201,57.151 ; -14.224,57.129 -14.224,60.1 ; -13.282,55.53 -13.282,58.07 -13.101,58.251 -13.101,60.1 ; -12.012,56.8 -12.012,60.089 ; -12.006,60.089 -11.995,60.1 ; -10.901,60.1 -10.901,58.229 -10.742,58.07 -10.742,55.53 ; -9.801,60.1 -9.801,57.129 -9.472,56.8 ; -8.701,60.1 -8.701,58.569 -8.202,58.07 -8.202,55.53 ; -7.601,60.1 -6.932,59.431 -6.932,56.8

## Polygon pours and split planes (outlines as drawn)
no net on Top Solder "Bottom Solder-No Net" (solid): -45.42,4.203 -41.338,4.203 cw(c-41.338,3.857) -40.991,3.857 -40.991,1.066 cw(c-41.269,1.066) -41.269,0.789 -45.434,0.789 cw(c-45.434,1.097) -45.743,1.097 -45.743,3.879 cw(c-45.419,3.879) -45.419,4.203
no net on Bottom Solder "Bottom Solder-No Net" (solid): -35.214,4.203 -39.296,4.203 ccw(c-39.296,3.857) -39.643,3.857 -39.643,1.066 ccw(c-39.365,1.066) -39.365,0.789 -35.2,0.789 ccw(c-35.2,1.097) -34.891,1.097 -34.891,3.879 ccw(c-35.215,3.879) -35.215,4.203

## Keep-outs
Keep-Out Layer:
  lines w0.127: -88.221,0 -88.221,65.31 0,65.31 0,0 -88.221,0

## Other copper
Top Layer:
  region: -18.113,61.776 -18.657,61.776 -18.657,59.198 -18.113,59.198
  region: -30.813,61.776 -31.357,61.776 -31.357,59.198 -30.813,59.198
  region: -43.513,61.776 -44.057,61.776 -44.057,59.198 -43.513,59.198
  region: -56.213,61.776 -56.757,61.776 -56.757,59.198 -56.213,59.198
  region: -68.913,61.776 -69.457,61.776 -69.457,59.198 -68.913,59.198
  region: 565 vertices and 1 holes, not listed, extent -45.731,0.801 -41.002,4.191
  region: 791 vertices and 0 holes, not listed, extent -45.181,1.096 -41.229,3.882
  region: 526 vertices and 1 holes, not listed, extent -36.393,2.208 -34.919,3.775
  region: 527 vertices and 1 holes, not listed, extent -37.907,2.221 -36.527,3.775
  region: 292 vertices and 1 holes, not listed, extent -39.072,2.208 -37.693,3.775
  region: 507 vertices and 1 holes, not listed, extent -40.653,2.208 -39.22,3.775
  region: 531 vertices and 0 holes, not listed, extent -45.503,1.511 -44.177,3.829
  text "T" at -2.831,57.498 h2.26 r270
  text "S" at -2.807,54.961 h2.26 r270
  text "R" at -2.831,52.483 h2.26 r270
  text "Q" at -2.721,50.011 h2.26 r270
  text "P" at -2.831,47.318 h2.26 r270
  text "O" at -1.357,43.532 h2.26 r90
  text "N" at -2.831,42.256 h2.26 r270
  text "M" at -2.831,39.837 h2.26 r270
  text "L" at -2.831,37.057 h2.26 r270
  text "K" at -2.831,34.664 h2.26 r270
  text "J" at -2.807,31.929 h2.26 r270
  text "I" at -2.831,29.081 h2.26 r270
  text "H" at -2.831,27.012 h2.26 r270
  text "G" at -2.807,24.575 h2.26 r270
  text "F" at -2.831,21.854 h2.26 r270
  text "E" at -2.831,19.366 h2.26 r270
  text "D" at -2.831,16.883 h2.26 r270
  text "C" at -2.807,14.385 h2.26 r270
  text "B" at -2.831,11.752 h2.26 r270
  text "A" at -2.831,9.342 h2.26 r270
  text "32" at -83.765,6.69 h2 r270
  text "31" at -81.225,6.69 h2 r270
  text "30" at -78.685,6.69 h2 r270
  text "29" at -76.145,6.69 h2 r270
  text "28" at -73.605,6.69 h2 r270
  text "27" at -71.076,6.69 h2 r270
  text "26" at -68.525,6.69 h2 r270
  text "25" at -65.985,6.69 h2 r270
  text "24" at -63.456,6.69 h2 r270
  text "23" at -60.905,6.69 h2 r270
  text "22" at -58.376,6.69 h2 r270
  text "21" at -55.836,6.69 h2 r270
  text "20" at -53.285,6.69 h2 r270
  text "19" at -50.794,6.69 h2 r270
  text "18" at -48.254,6.69 h2 r270
  text "17" at -45.714,6.69 h2 r270
  text "16" at -43.174,6.69 h2 r270
  text "15" at -40.634,6.69 h2 r270
  text "14" at -38.094,6.69 h2 r270
  text "13" at -35.554,6.69 h2 r270
  text "12" at -33.014,6.69 h2 r270
  text "11" at -30.474,6.69 h2 r270
  text "10" at -27.934,6.69 h2 r270
  text "9" at -25.394,6.69 h2 r270
  text "8" at -22.854,6.69 h2 r270
  text "7" at -20.314,6.69 h2 r270
  text "6" at -17.774,6.69 h2 r270
  text "5" at -15.234,6.69 h2 r270
  text "4" at -12.694,6.69 h2 r270
  text "3" at -10.154,6.69 h2 r270
  text "2" at -7.614,6.69 h2 r270
  text "1" at -5.074,6.69 h2 r270
  text "More info at CrowdSupply.com" at -79.713,1.853 h2.54
  text "ALio Proto Board" at -29.515,1.641 h2.54
Bottom Layer:
  rectangle: -18.657,59.198 -18.113,61.776
  rectangle: -31.357,59.198 -30.813,61.776
  rectangle: -44.057,59.198 -43.513,61.776
  rectangle: -56.757,59.198 -56.213,61.776
  rectangle: -69.457,59.198 -68.913,61.776
  region: 531 vertices and 0 holes, not listed, extent -36.454,1.511 -35.128,3.829
  region: 507 vertices and 1 holes, not listed, extent -41.411,2.208 -39.977,3.775
  region: 292 vertices and 1 holes, not listed, extent -42.938,2.208 -41.558,3.775
  region: 527 vertices and 1 holes, not listed, extent -44.104,2.221 -42.724,3.775
  region: 526 vertices and 1 holes, not listed, extent -45.711,2.208 -44.238,3.775
  region: 791 vertices and 0 holes, not listed, extent -39.401,1.096 -35.449,3.882
  region: 565 vertices and 1 holes, not listed, extent -39.629,0.801 -34.9,4.191
  text "T" at -2.831,56.352 h2.26 r270
  text "S" at -2.807,53.809 h2.26 r270
  text "R" at -2.831,51.207 h2.26 r270
  text "Q" at -2.721,48.599 h2.26 r270
  text "P" at -2.831,46.212 h2.26 r270
  text "O" at -2.807,43.532 h2.26 r270
  text "N" at -2.831,41.114 h2.26 r270
  text "M" at -2.831,38.453 h2.26 r270
  text "L" at -2.831,36.153 h2.26 r270
  text "K" at -2.831,33.466 h2.26 r270
  text "J" at -2.807,31.121 h2.26 r270
  text "I" at -2.831,28.889 h2.26 r270
  text "H" at -2.831,25.878 h2.26 r270
  text "G" at -2.807,23.235 h2.26 r270
  text "F" at -2.831,20.876 h2.26 r270
  text "E" at -2.831,18.284 h2.26 r270
  text "D" at -2.831,15.687 h2.26 r270
  text "C" at -2.807,13.105 h2.26 r270
  text "B" at -2.831,10.658 h2.26 r270
  text "A" at -2.831,7.988 h2.26 r270
  text "31" at -81.225,4.94 h2 r270
  text "30" at -78.685,4.94 h2 r270
  text "29" at -76.145,4.94 h2 r270
  text "28" at -73.605,4.94 h2 r270
  text "27" at -71.076,4.94 h2 r270
  text "26" at -68.525,4.94 h2 r270
  text "25" at -65.985,4.94 h2 r270
  text "24" at -63.456,4.94 h2 r270
  text "23" at -60.946,4.94 h2 r270
  text "22" at -58.376,4.94 h2 r270
  text "21" at -55.866,4.94 h2 r270
  text "20" at -53.285,4.94 h2 r270
  text "19" at -50.786,4.94 h2 r270
  text "18" at -48.246,4.94 h2 r270
  text "17" at -45.706,4.94 h2 r270
  text "16" at -43.166,4.94 h2 r270
  text "15" at -40.626,4.94 h2 r270
  text "14" at -38.086,4.94 h2 r270
  text "13" at -35.546,4.94 h2 r270
  text "12" at -33.006,4.94 h2 r270
  text "11" at -30.466,4.94 h2 r270
  text "10" at -27.926,4.94 h2 r270
  text "9" at -25.386,4.94 h2 r270
  text "8" at -22.846,4.94 h2 r270
  text "7" at -20.306,4.94 h2 r270
  text "6" at -17.766,4.94 h2 r270
  text "5" at -15.226,4.94 h2 r270
  text "4" at -12.686,4.94 h2 r270
  text "3" at -10.146,4.94 h2 r270
  text "2" at -7.606,4.932 h2 r270

## Silkscreen, mask and mechanical layers (free items; w line width, h text height)
Bottom Overlay:
  text "T" at -2.831,56.352 h2.26 r270
  text "S" at -2.807,53.809 h2.26 r270
  text "R" at -2.831,51.207 h2.26 r270
  text "Q" at -2.721,48.599 h2.26 r270
  text "P" at -2.831,46.212 h2.26 r270
  text "O" at -2.807,43.532 h2.26 r270
  text "N" at -2.831,41.114 h2.26 r270
  text "M" at -2.831,38.453 h2.26 r270
  text "L" at -2.831,36.153 h2.26 r270
  text "K" at -2.831,33.466 h2.26 r270
  text "J" at -2.807,31.121 h2.26 r270
  text "I" at -2.831,28.889 h2.26 r270
  text "H" at -2.831,25.878 h2.26 r270
  text "G" at -2.807,23.235 h2.26 r270
  text "F" at -2.831,20.876 h2.26 r270
  text "E" at -2.831,18.284 h2.26 r270
  text "D" at -2.831,15.687 h2.26 r270
  text "C" at -2.807,13.105 h2.26 r270
  text "B" at -2.831,10.658 h2.26 r270
  text "A" at -2.831,7.988 h2.26 r270
  text "1" at -5.061,5.922 h2 r270
  text "32" at -83.765,4.94 h2 r270
  text "31" at -81.225,4.94 h2 r270
  text "30" at -78.685,4.94 h2 r270
  text "29" at -76.145,4.94 h2 r270
  text "28" at -73.605,4.94 h2 r270
  text "27" at -71.076,4.94 h2 r270
  text "26" at -68.525,4.94 h2 r270
  text "25" at -65.985,4.94 h2 r270
  text "24" at -63.456,4.94 h2 r270
  text "23" at -60.946,4.94 h2 r270
  text "22" at -58.376,4.94 h2 r270
  text "21" at -55.866,4.94 h2 r270
  text "20" at -53.285,4.94 h2 r270
  text "19" at -50.786,4.94 h2 r270
  text "18" at -48.246,4.94 h2 r270
  text "17" at -45.706,4.94 h2 r270
  text "16" at -43.166,4.94 h2 r270
  text "15" at -40.626,4.94 h2 r270
  text "14" at -38.086,4.94 h2 r270
  text "13" at -35.546,4.94 h2 r270
  text "12" at -33.006,4.94 h2 r270
  text "11" at -30.466,4.94 h2 r270
  text "10" at -27.926,4.94 h2 r270
  text "9" at -25.386,4.94 h2 r270
  text "8" at -22.846,4.94 h2 r270
  text "7" at -20.306,4.94 h2 r270
  text "6" at -17.766,4.94 h2 r270
  text "5" at -15.226,4.94 h2 r270
  text "4" at -12.686,4.94 h2 r270
  text "3" at -10.146,4.94 h2 r270
  text "2" at -7.606,4.932 h2 r270
  text "More info at CrowdSupply.com" at -48.936,1.853 h2.54
  text "ALio Proto Board" at -12.363,1.641 h2.54
Top Solder:
  region: -3.741,40.38 -86.291,40.38 -86.291,7.014 -3.741,7.014
  region: -3.741,57.433 -86.291,57.433 -86.291,40.38 -3.741,40.38
  region: -18.113,61.776 -18.657,61.776 -18.657,59.198 -18.113,59.198
  region: -30.813,61.776 -31.357,61.776 -31.357,59.198 -30.813,59.198
  region: -43.513,61.776 -44.057,61.776 -44.057,59.198 -43.513,59.198
  region: -56.213,61.776 -56.757,61.776 -56.757,59.198 -56.213,59.198
  region: -68.913,61.776 -69.457,61.776 -69.457,59.198 -68.913,59.198
  text "T" at -2.831,57.498 h2.26 r270
  text "S" at -2.807,54.961 h2.26 r270
  text "R" at -2.831,52.483 h2.26 r270
  text "Q" at -2.721,50.011 h2.26 r270
  text "P" at -2.831,47.318 h2.26 r270
  text "O" at -2.807,44.918 h2.26 r270
  text "N" at -2.831,42.256 h2.26 r270
  text "M" at -2.831,39.837 h2.26 r270
  text "L" at -2.831,37.057 h2.26 r270
  text "K" at -2.831,34.664 h2.26 r270
  text "J" at -2.807,31.929 h2.26 r270
  text "I" at -2.831,29.081 h2.26 r270
  text "H" at -2.831,27.012 h2.26 r270
  text "G" at -2.807,24.575 h2.26 r270
  text "F" at -2.831,21.854 h2.26 r270
  text "E" at -2.831,19.366 h2.26 r270
  text "D" at -2.831,16.883 h2.26 r270
  text "C" at -2.807,14.385 h2.26 r270
  text "B" at -2.831,11.752 h2.26 r270
  text "A" at -2.831,9.342 h2.26 r270
  text "32" at -83.765,6.69 h2 r270
  text "31" at -81.225,6.69 h2 r270
  text "30" at -78.685,6.69 h2 r270
  text "29" at -76.145,6.69 h2 r270
  text "28" at -73.605,6.69 h2 r270
  text "27" at -71.076,6.69 h2 r270
  text "26" at -68.525,6.69 h2 r270
  text "25" at -65.985,6.69 h2 r270
  text "24" at -63.456,6.69 h2 r270
  text "23" at -60.905,6.69 h2 r270
  text "22" at -58.376,6.69 h2 r270
  text "21" at -55.836,6.69 h2 r270
  text "20" at -53.285,6.69 h2 r270
  text "19" at -50.794,6.69 h2 r270
  text "18" at -48.254,6.69 h2 r270
  text "17" at -45.714,6.69 h2 r270
  text "16" at -43.174,6.69 h2 r270
  text "15" at -40.634,6.69 h2 r270
  text "14" at -38.094,6.69 h2 r270
  text "13" at -35.554,6.69 h2 r270
  text "12" at -33.014,6.69 h2 r270
  text "11" at -30.474,6.69 h2 r270
  text "10" at -27.934,6.69 h2 r270
  text "9" at -25.394,6.69 h2 r270
  text "8" at -22.854,6.69 h2 r270
  text "7" at -20.314,6.69 h2 r270
  text "6" at -17.774,6.69 h2 r270
  text "5" at -15.234,6.69 h2 r270
  text "4" at -12.694,6.69 h2 r270
  text "3" at -10.154,6.69 h2 r270
  text "2" at -7.614,6.69 h2 r270
  text "1" at -5.074,6.69 h2 r270
  text "More info at CrowdSupply.com" at -79.713,1.853 h2.54
  text "ALio Proto Board" at -29.515,1.641 h2.54
Bottom Solder:
  region: -3.741,40.542 -86.291,40.542 -86.291,7.014 -3.741,7.014
  region: -3.741,57.433 -86.291,57.433 -86.291,40.542 -3.741,40.542
  rectangle: -18.657,59.198 -18.113,61.776
  rectangle: -31.357,59.198 -30.813,61.776
  rectangle: -44.057,59.198 -43.513,61.776
  rectangle: -56.757,59.198 -56.213,61.776
  rectangle: -69.457,59.198 -68.913,61.776

## Dimensions
0,65.31 to 0,0 on Mechanical 13
-88.221,65.31 to 0,65.31 on Mechanical 13